# Altium PCB T-Type Converter.PcbDoc (part 1 of 4)
Units mil, origin at the board's own origin, x right, y up, seen from the top; angles counter-clockwise.
Board outline 14649.61 x 8960.63 mil, 2 copper layers (Top Layer, Bottom Layer), stack 64.8 mil thick; 214 components, 130 nets, 860 pads, 57 vias.
Unrouted connection lines stored in the file: 20.
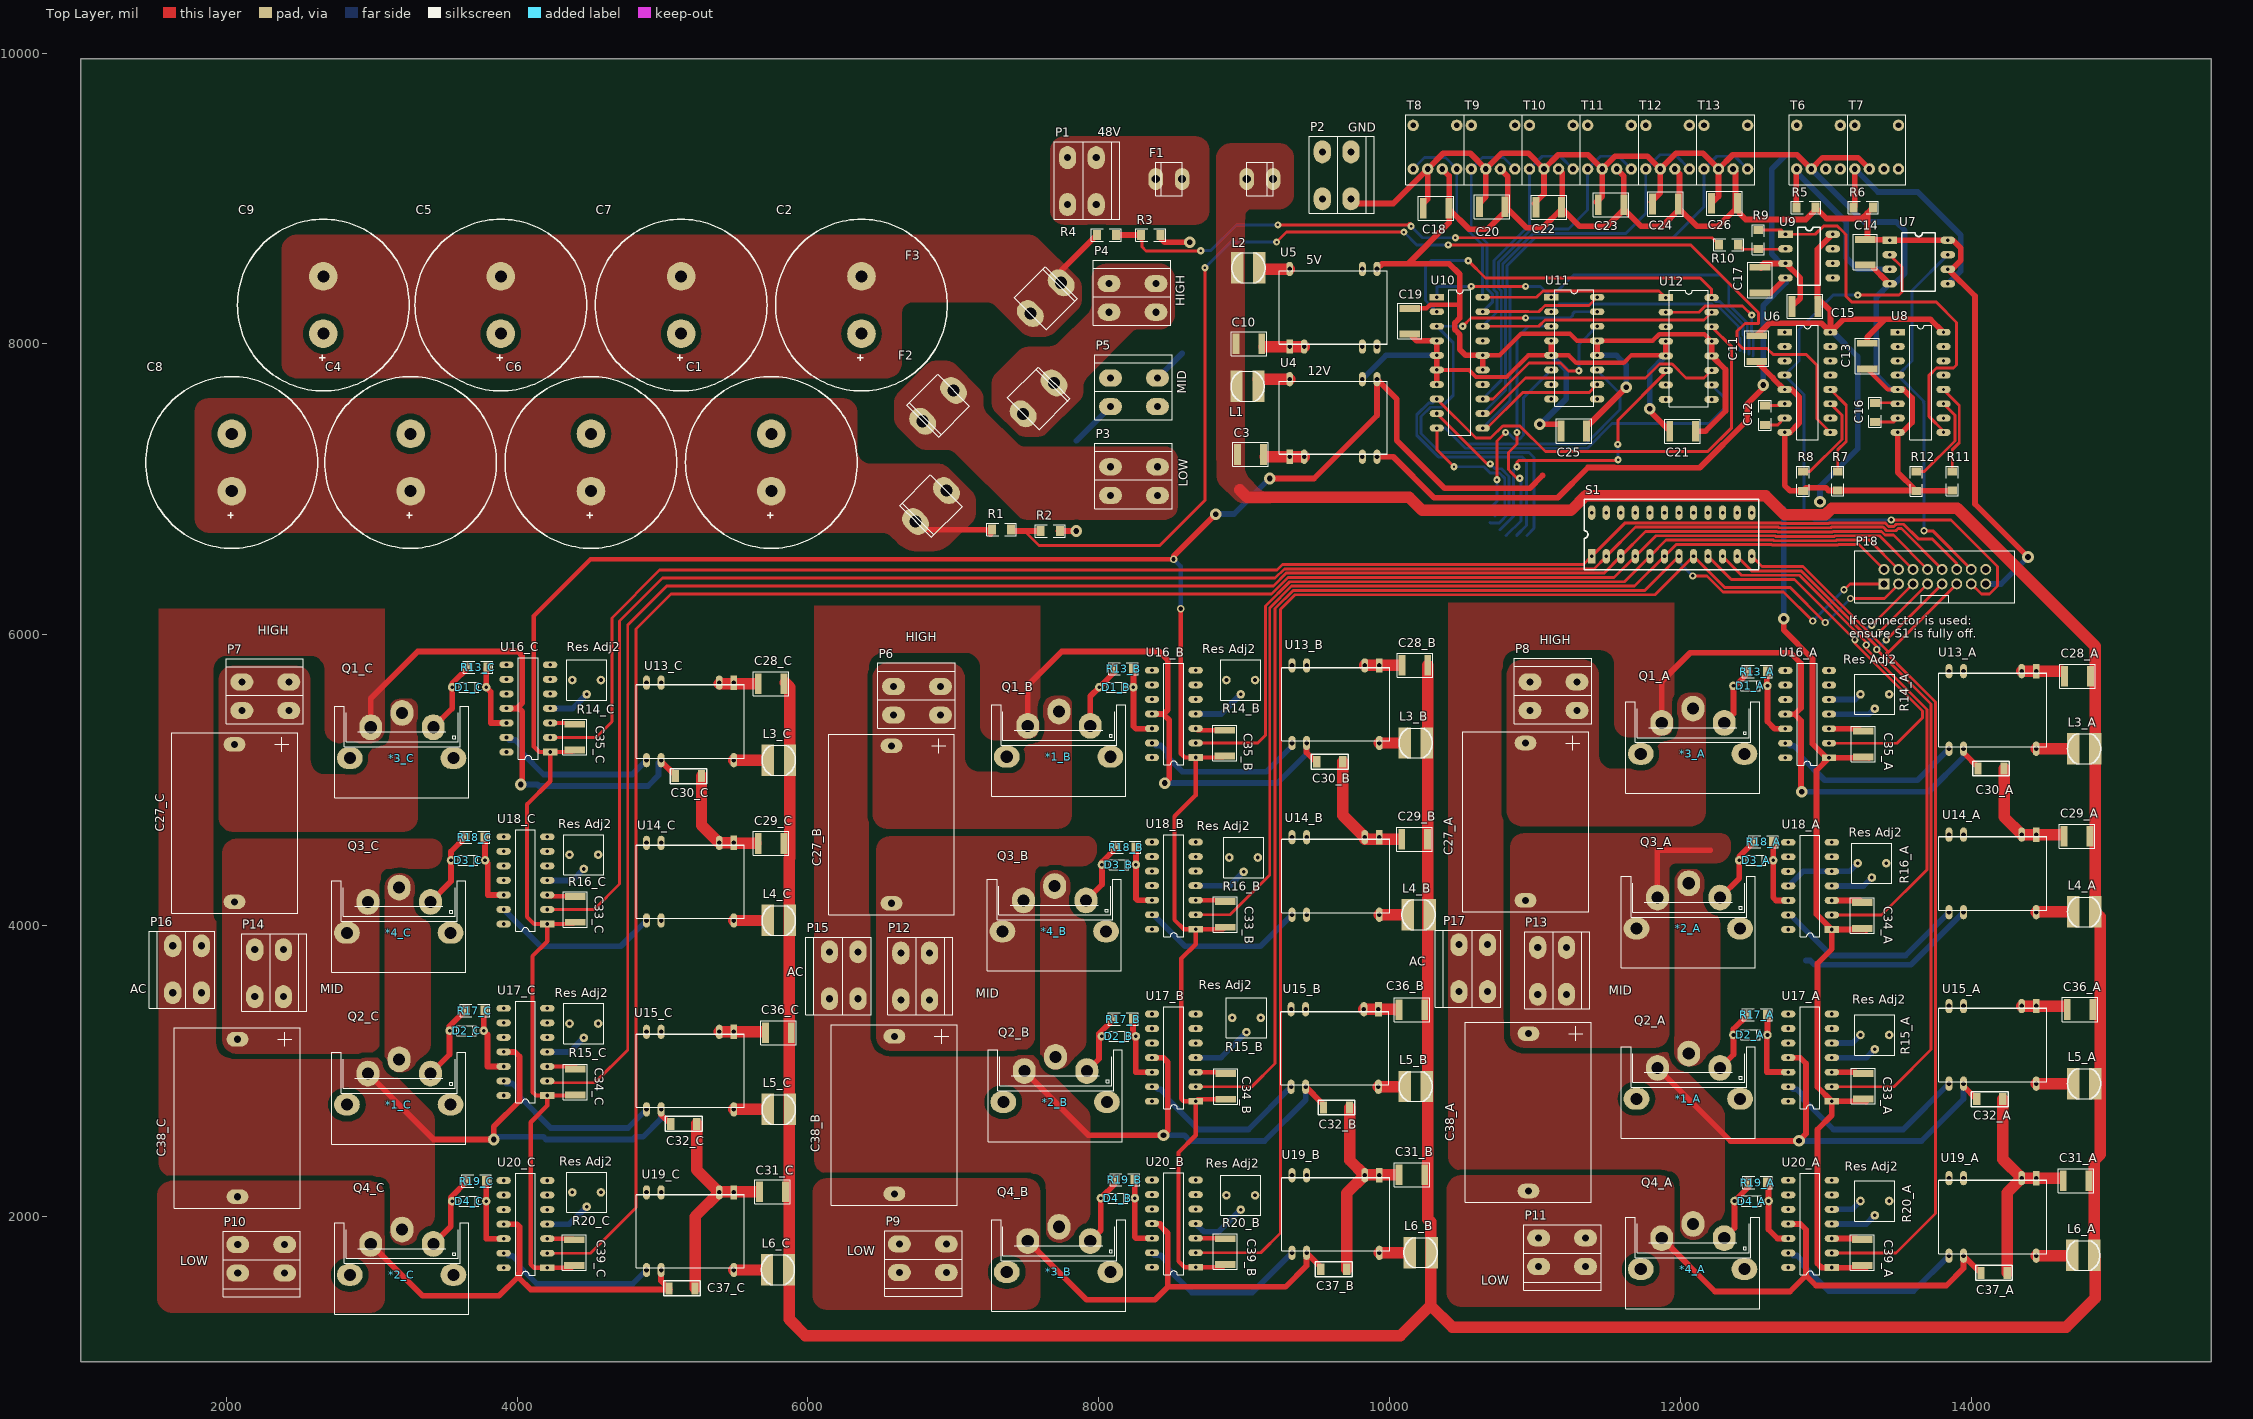
[diagram p0: Top Layer view]
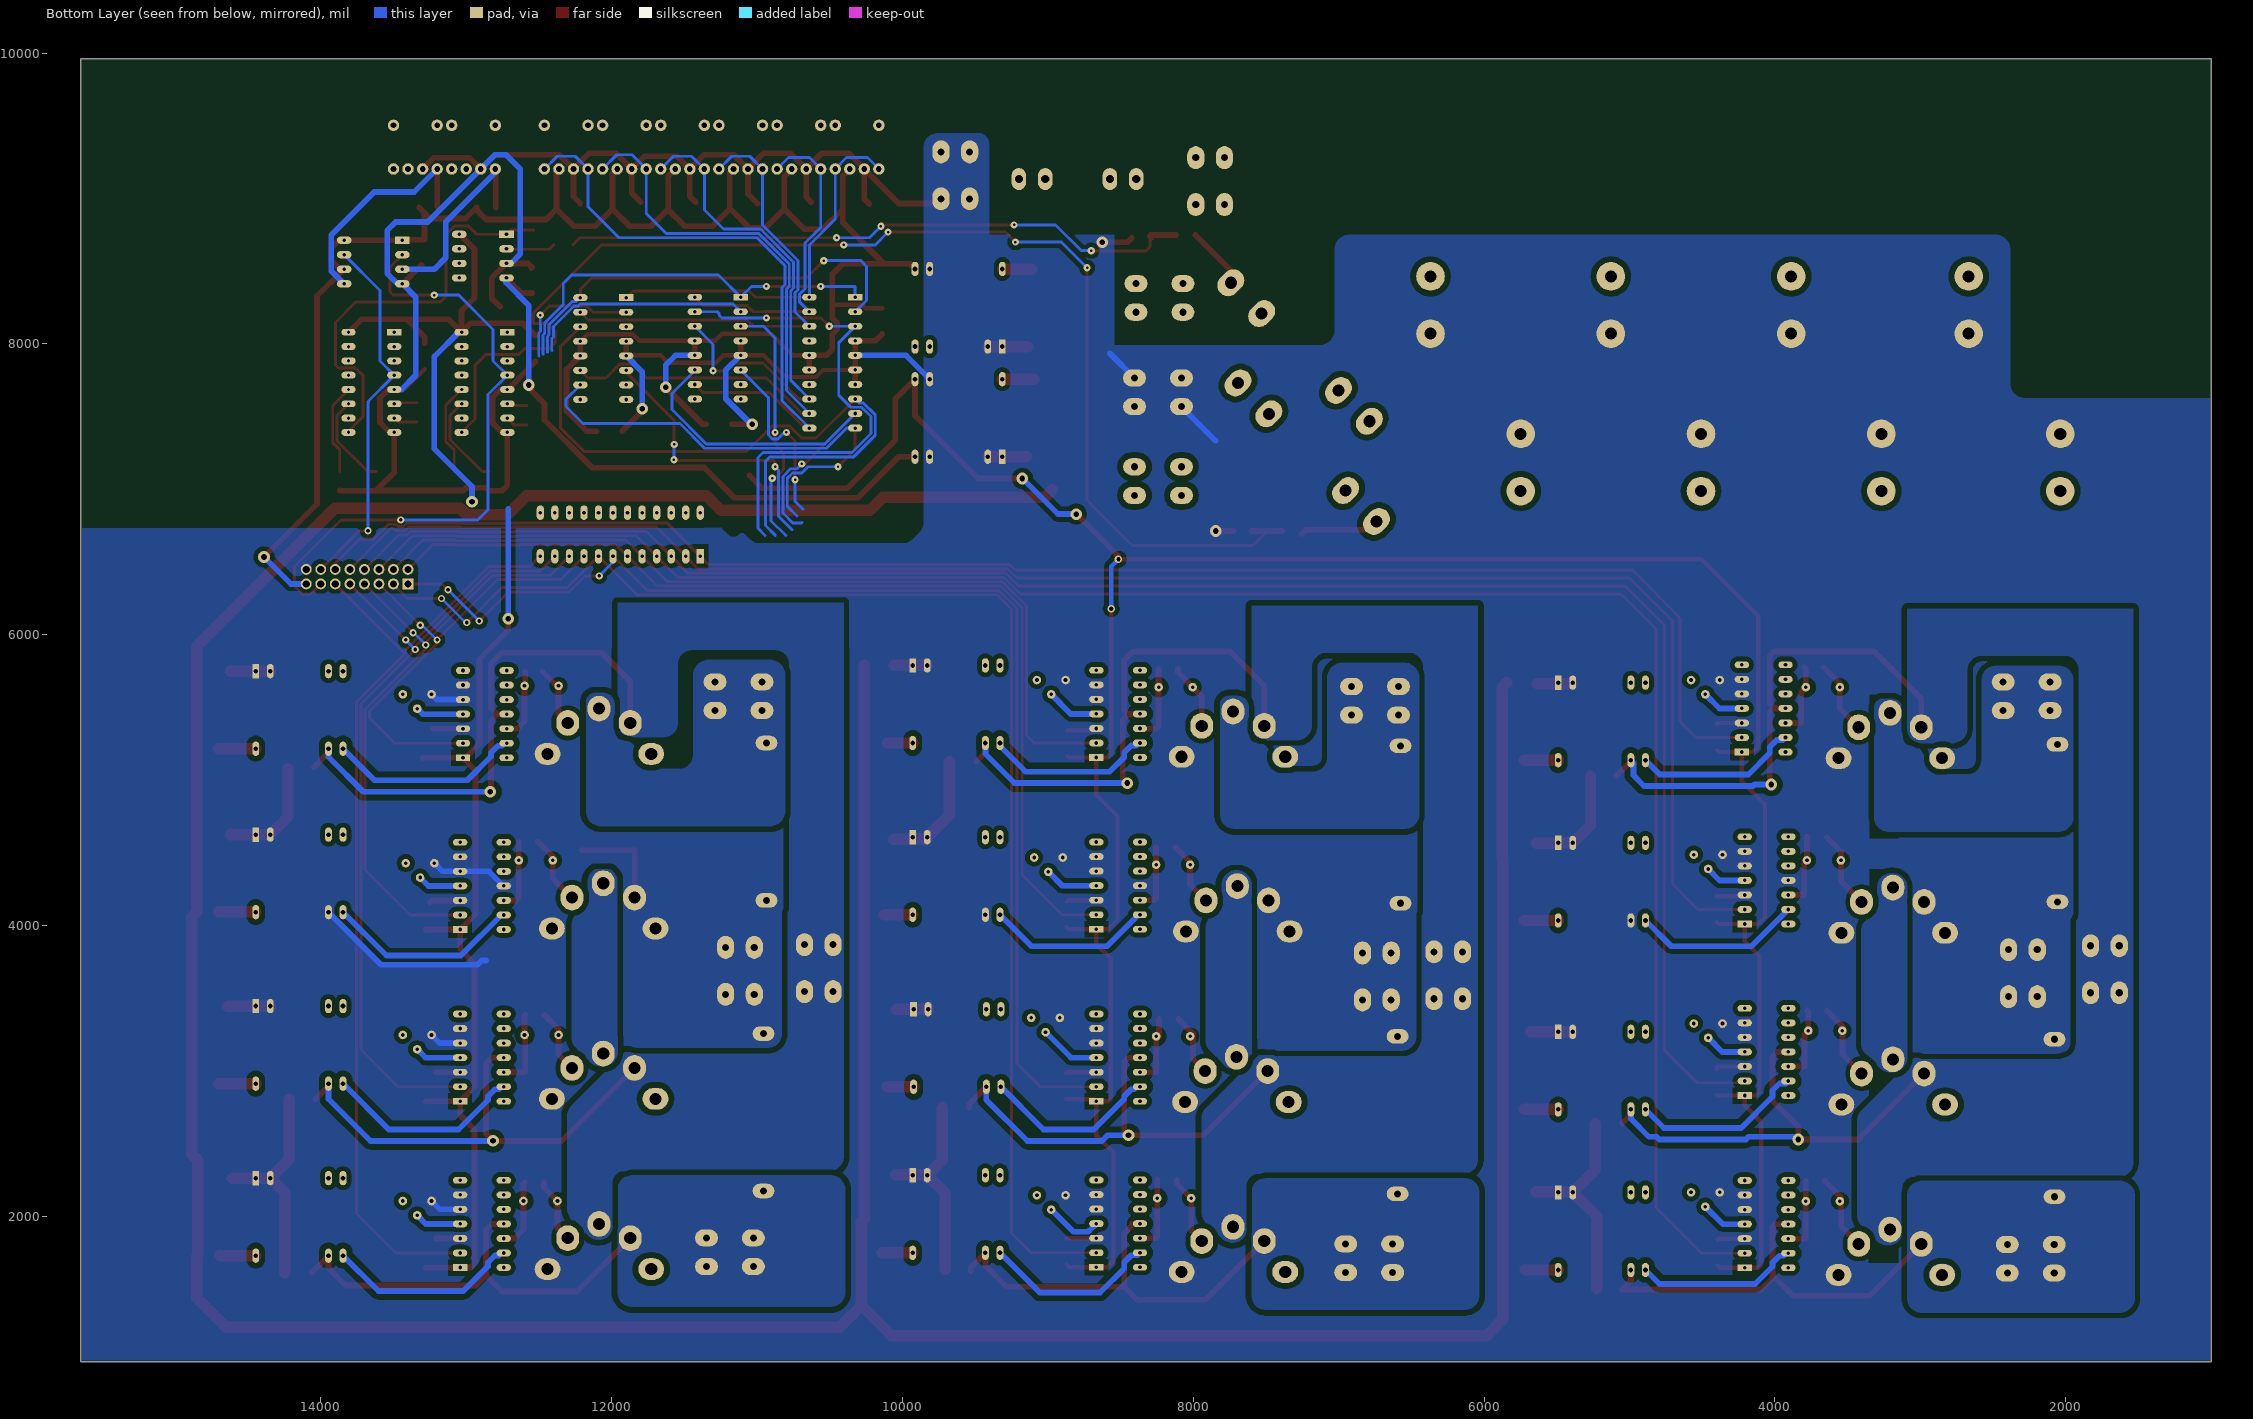
[diagram p1: Bottom Layer view, seen from below]

## Layer stack, top to bottom
Top Solder: solder mask 0.4, Solder Resist, Dk 3.5
Top Layer: signal copper 1.4
Dielectric 1: dielectric 62, FR-4, Dk 4.8
Bottom Layer: signal copper 1.4
Bottom Solder: solder mask 0.4, Solder Resist, Dk 3.5

## Board outline
1000,1000 15649.61,1000 15649.61,9960.63 1000,9960.63

## Design rules (kind name [scope] priority, off if disabled: settings)
BoardOutlineClearance [All] p1: gap=10 ignorepadtopadclearanceinfootprint=FALSE except(0: Arc-SplitContinuation Track-SplitContinuation SMDPad-SplitContinuation THPad-SplitContinuation Via-SplitContinuation Fill-SplitContinuation Poly-SplitContinuation Region-SplitContinuation Text-SplitContinuation)
Clearance Clearance_HV [InNetClass('HV')] p1: gap=39.37 ignorepadtopadclearanceinfootprint=FALSE except(0: Arc-Hole Track-Hole SMDPad-Hole THPad-Hole Via-Hole Fill-Hole Poly-Hole Region-Hole Text-Hole)
Clearance Clearance_1 [All] p2: gap=10 ignorepadtopadclearanceinfootprint=FALSE except(0: Arc-Hole Track-Hole SMDPad-Hole THPad-Hole Via-Hole Fill-Hole Poly-Hole Region-Hole Text-Hole; 31.5: Arc-Poly Track-Poly SMDPad-Poly THPad-Poly Via-Poly Fill-Poly Poly-Poly Poly-Region Poly-Text)
ComponentClearance [All] p1 off: gap=0.39 collisioncheckmode=3 verticalgap=100000 showdistances=FALSE
Height [All] p1: minheight=0 maxheight=1968.5 prefheight=500
HoleSize [All] p1: absolutevalues=TRUE maxlimit=314.96 minlimit=1 maxpercent=80.000 minpercent=20.000
PolygonConnect [All] p1: connectstyle=Direct reliefconductorwidth=10 reliefentries=4 polygonreliefangle="90 Angle" airgapwidth=10
RoutingVias [All] p1: holewidth=17 width=50 viastyle="Through Hole" minholewidth=10 minwidth=50 maxholewidth=40 maxwidth=80
SolderMaskExpansion [All] p1: expansion=4
Width [All] p1: maxlimit=78.74 minlimit=10 preferedwidth=30 minimp=50.000000 maximp=50.000000 favimp=50.000000
27 further rules are at their usual default settings.

## Classes and differential pairs
channel class Switches: A B C
component class A: *1_A *1_U_Switches3 *2_A *2_U_Switches3 *3_A *4_A *4_U_Switches3 *_U_Switches3 C27_A C28_A C29_A C30_A C31_A C32_A C33_A C34_A C35_A C36_A C37_A C38_A C39_A D1_A D2_A D3_A D4_A L3_A L4_A L5_A L6_A Q Q1_A Q2_A Q3_A Q4_A R13_A R14_A R15_A R16_A R17_A R18_A R19_A R20_A U13_A U14_A U15_A U16_A U17_A U18_A U19_A U20_A
component class B: *1_B *2_B *2_U_Switches2 *3_B *3_U_Switches2 *4_B *4_U_Switches2 *_U_Switches2 C27_B C28_B C29_B C30_B C31_B C32_B C33_B C34_B C35_B C36_B C37_B C38_B C39_B D1_B D2_B D3_B D4_B L3_B L4_B L5_B L6_B Q1_B Q2_B Q3_B Q4_B R13_B R14_B R15_B R16_B R17_B R18_B R19_B R20_B U13_B U14_B U15_B U16_B U17_B U18_B U19_B U20_B
component class C: *1_C *1_U_Switches1 *2_C *2_U_Switches1 *3_C *3_U_Switches1 *4_C *_U_Switches1 C27_C C28_C C29_C C30_C C31_C C32_C C33_C C34_C C35_C C36_C C37_C C38_C C39_C D1_C D2_C D3_C D4_C L3_C L4_C L5_C L6_C Q1_C Q2_C Q3_C Q4_C R13_C R14_C R15_C R16_C R17_C R18_C R19_C R20_C U13_C U14_C U15_C U16_C U17_C U18_C U19_C U20_C
component class U_Signals: C18 C19 C20 C21 C22 C23 C24 C25 C26 T8 T9 T10 T11 T12 T13 U10 U11 U12
component class Main: C1 C2 C3 C4 C5 C6 C7 C8 C9 C10 C11 C12 C13 C14 C15 C16 C17 F1 F2 F3 L1 L2 P1 P2 P3 P4 P5 P6 P7 P8 P9 P10 P11 P12 P13 P14 P15 P16 P17 P18 R1 R2 R3 R4 R5 R6 R7 R8 R9 R10 R11 R12 S1 T6 T7 U4 U5 U6 U7 U8 U9
net class HV: NetC1_1 NetC2_2 NetC27_A_1 NetC27_B_1 NetC27_C_1 NetC30_A_1 NetC30_B_1 NetC30_C_1 NetC37_A_1 NetC37_B_1 NetC37_C_1 NetD1_A_1 NetD1_B_1 NetD1_C_1 NetD2_A_1 NetD2_B_1 NetD2_C_1 NetD4_A_1 NetD4_B_1 NetD4_C_1 NetF2_1 NetF3_2 NetL3_A_2 NetL3_B_2 NetL3_C_2 NetL4_A_2 NetL4_B_2 NetL4_C_2 NetL5_A_2 NetL5_B_2 NetL5_C_2 NetL6_A_2 NetL6_B_2 NetL6_C_2 NetQ2_A_2 NetQ2_B_2 NetQ2_C_2 NetU13_A_8 NetU13_B_8 NetU13_C_8 NetU15_A_8 NetU15_B_8 NetU15_C_8 NetU19_A_8 NetU19_B_8 NetU19_C_8

## Components (designator, comment, footprint, x,y, rotation, side; value= is the part's Value field where it differs from the comment)
*1_A "WA-T264-101E" Heatsink 12514.76,2537.4 r90 top (schematic designator *1)
*1_B "WA-T264-101E" Heatsink 8184.06,4889.76 r90 top (schematic designator *1)
*1_C "WA-T264-101E" Heatsink 3646.65,2498.03 r90 top (schematic designator *1)
*2_A "WA-T264-101E" Heatsink 12514.76,3708.66 r90 top (schematic designator *2)
*2_B "WA-T264-101E" Heatsink 8160.53,2515.31 r90 top (schematic designator *2)
*2_C "WA-T264-101E" Heatsink 3666.34,1326.77 r90 top (schematic designator *2)
*3_A "WA-T264-101E" Heatsink 12544.29,4909.45 r90 top (schematic designator *3)
*3_B "WA-T264-101E" Heatsink 8184.06,1346.46 r90 top (schematic designator *3)
*3_C "WA-T264-101E" Heatsink 3666.34,4879.92 r90 top (schematic designator *3)
*4_A "WA-T264-101E" Heatsink 12544.29,1366.14 r90 top (schematic designator *4)
*4_B "WA-T264-101E" Heatsink 8154.53,3688.98 r90 top (schematic designator *4)
*4_C "WA-T264-101E" Heatsink 3646.65,3679.13 r90 top (schematic designator *4)
C1 "Cap Pol1" LGW2G331MELB40 5748.03,6988.19 r90 top value=330uF
C2 "Cap Pol1" LGW2G331MELB40 6368.11,8070.87 r90 top value=330uF
C3 "Cap" C4532 9043.31,7240.16 r180 top value=4.7uF
C4 "Cap Pol1" LGW2G331MELB40 3267.72,6988.19 r90 top value=330uF
C5 "Cap Pol1" LGW2G331MELB40 3887.8,8070.87 r90 top value=330uF
C6 "Cap Pol1" LGW2G331MELB40 4507.87,6988.19 r90 top value=330uF
C7 "Cap Pol1" LGW2G331MELB40 5127.95,8070.87 r90 top value=330uF
C8 "Cap Pol1" LGW2G331MELB40 2037.4,6988.19 r90 top value=330uF
C9 "Cap Pol1" LGW2G331MELB40 2667.32,8070.87 r90 top value=330uF
C10 "Cap" C4532 9032.48,8000.98 r180 top value=4.7uF
C11 "Cap" C4532 12523.62,7967.52 r90 top value=4.7uF
C12 "Cap" R_1206 12580.71,7508.86 r180 top value=2.2nF
C13 "Cap" C4532 13284.45,7916.34 r90 top value=4.7uF
C14 "Cap" C4532 13271.65,8630.91 r90 top value=4.7uF
C15 "Cap" C4532 12856.3,8257.87 r0 top value=4.7uF
C16 "Cap" R_1206 13336.61,7528.54 r180 top value=2.2nF
C17 "Cap" C4532 12547.24,8438.98 r90 top value=4.7uF
C18 "Cap" C4532 10319.88,8933.07 r0 top value=4.7uF
C19 "Cap" C4532 10138.78,8156.5 r90 top value=4.7uF
C20 "Cap" C4532 10705.71,8942.91 r0 top value=4.7uF
C21 "Cap" C4532 12014.76,7400.59 r0 top value=4.7uF
C22 "Cap" C4532 11094.49,8939.96 r0 top value=4.7uF
C23 "Cap" C4532 11523.62,8958.66 r0 top value=4.7uF
C24 "Cap" C4532 11896.65,8962.6 r0 top value=4.7uF
C25 "Cap" C4532 11266.73,7401.57 r0 top value=4.7uF
C26 "Cap" C4532 12303.15,8966.54 r0 top value=4.7uF
C27_A "Cap Pol1" B32674D3126K000 10935.04,5255.91 r270 top value=3.3mf (schematic designator C27)
C27_B "Cap Pol1" B32674D3126K000 6574.8,5236.22 r270 top value=3.3mf (schematic designator C27)
C27_C "Cap Pol1" B32674D3126K000 2057.09,5246.06 r270 top value=3.3mf (schematic designator C27)
C28_A "Cap" C4532 14730.32,5715.55 r0 top value=4.7uF (schematic designator C28)
C28_B "Cap" C4532 10174.21,5789.37 r0 top value=4.7uF (schematic designator C28)
C28_C "Cap" C4532 5747.05,5664.37 r0 top value=4.7uF (schematic designator C28)
C29_A "Cap" C4532 14727.36,4615.16 r0 top value=4.7uF (schematic designator C29)
C29_B "Cap" C4532 10172.24,4594.49 r0 top value=4.7uF (schematic designator C29)
C29_C "Cap" C4532 5747.05,4564.96 r0 top value=4.7uF (schematic designator C29)
C30_A "Cap" "LS 1808" 14135.83,5080.71 r0 top value=220pF (schematic designator C30)
C30_B "Cap" "LS 1808" 9588.58,5126.97 r0 top value=220pF (schematic designator C30)
C30_C "Cap" "LS 1808" 5178.15,5028.54 r0 top value=220pF (schematic designator C30)
C31_A "Cap" C4532 14721.46,2246.06 r0 top value=4.7uF (schematic designator C31)
C31_B "Cap" C4532 10153.54,2287.4 r0 top value=4.7uF (schematic designator C31)
C31_C "Cap" C4532 5755.91,2169.29 r0 top value=4.7uF (schematic designator C31)
C32_A "Cap" "LS 1808" 14126.97,2807.09 r0 top value=220pF (schematic designator C32)
C32_B "Cap" "LS 1808" 9634.84,2749.02 r0 top value=220pF (schematic designator C32)
C32_C "Cap" "LS 1808" 5145.67,2636.81 r0 top value=220pF (schematic designator C32)
C33_A "Cap" C4532 13257.87,2895.67 r270 top value=4.7uF (schematic designator C33)
C33_B "Cap" C4532 8871.06,4077.76 r270 top value=4.7uF (schematic designator C33)
C33_C "Cap" C4532 4398.62,4112.2 r270 top value=4.7uF (schematic designator C33)
C34_A "Cap" C4532 13250,4069.88 r270 top value=4.7uF (schematic designator C34)
C34_B "Cap" C4532 8872.05,2894.68 r270 top value=4.7uF (schematic designator C34)
C34_C "Cap" C4532 4398.62,2924.21 r270 top value=4.7uF (schematic designator C34)
C35_A "Cap" C4532 13257.87,5249.02 r270 top value=4.7uF (schematic designator C35)
C35_B "Cap" C4532 8865.16,5254.92 r270 top value=4.7uF (schematic designator C35)
C35_C "Cap" C4532 4395.67,5296.26 r270 top value=4.7uF (schematic designator C35)
C36_A "Cap" C4532 14749.02,3423.23 r0 top value=4.7uF (schematic designator C36)
C36_B "Cap" C4532 10153.54,3422.24 r0 top value=4.7uF (schematic designator C36)
C36_C "Cap" C4532 5796.26,3262.8 r0 top value=4.7uF (schematic designator C36)
C37_A "Cap" "LS 1808" 14157.48,1612.2 r0 top value=220pF (schematic designator C37)
C37_B "Cap" "LS 1808" 9616.14,1636.81 r0 top value=220pF (schematic designator C37)
C37_C "Cap" "LS 1808" 5133.86,1505.91 r0 top value=220pF (schematic designator C37)
C38_A "Cap Pol1" B32674D3126K000 10954.72,3257.87 r270 top value=3.3mf (schematic designator C38)
C38_B "Cap Pol1" B32674D3126K000 6594.49,3238.19 r270 top value=3.3mf (schematic designator C38)
C38_C "Cap Pol1" B32674D3126K000 2076.77,3218.5 r270 top value=3.3mf (schematic designator C38)
C39_A "Cap" C4532 13249.02,1751.97 r270 top value=4.7uF (schematic designator C39)
C39_B "Cap" C4532 8871.06,1757.87 r270 top value=4.7uF (schematic designator C39)
C39_C "Cap" C4532 4392.72,1750.98 r270 top value=4.7uF (schematic designator C39)
D1_A "1N4148" DO-35_02 12598.43,5683.07 r180 top (schematic designator D1)
D1_B "1N4148" DO-35_02 8238.19,5674.21 r180 top (schematic designator D1)
D1_C "1N4148" DO-35_02 3787.01,5674.21 r180 top (schematic designator D1)
D2_A "1N4148" DO-35_02 12598.43,3282.48 r180 top (schematic designator D2)
D2_B "1N4148" DO-35_02 8254.92,3273.62 r180 top (schematic designator D2)
D2_C "1N4148" DO-35_02 3769.68,3312.01 r180 top (schematic designator D2)
D3_A "1N4148" DO-35_02 12637.8,4483.27 r180 top (schematic designator D3)
D3_B "1N4148" DO-35_02 8255.51,4453.74 r180 top (schematic designator D3)
D3_C "1N4148" DO-35_02 3779.53,4483.27 r180 top (schematic designator D3)
D4_A "1N4148" DO-35_02 12605.91,2140.75 r180 top (schematic designator D4)
D4_B "1N4148" DO-35_02 8248.03,2160.43 r180 top (schematic designator D4)
D4_C "1N4148" DO-35_02 3787.01,2139.76 r180 top (schematic designator D4)
F1 "Fuse Holder" "Small Fuse Holder" 8391.83,9133.86 r0 top
F2 "Fuse Holder" "Fuse footprint" 7692.45,7731.82 r225 top
F3 "Fuse Holder" "Fuse footprint" 7741.66,8420.79 r225 top
L1 "Inductor" TCK-047 9141.73,7598.43 r90 top value=10mH
L2 "Inductor" TCK-047 9147.64,8413.39 r90 top value=10mH
L3_A "Inductor" TCK-047 14657.48,5326.77 r270 top value=10uH (schematic designator L3)
L3_B "Inductor" TCK-047 10061.02,5366.14 r270 top value=10uH (schematic designator L3)
L3_C "Inductor" TCK-047 5681.1,5248.03 r270 top value=10uH (schematic designator L3)
L4_A "Inductor" TCK-047 14657.48,4204.72 r270 top value=10uH (schematic designator L4)
L4_B "Inductor" TCK-047 10080.71,4185.04 r270 top value=10uH (schematic designator L4)
L4_C "Inductor" TCK-047 5681.1,4145.67 r270 top value=10uH (schematic designator L4)
L5_A "Inductor" TCK-047 14657.48,3023.62 r270 top value=10uH (schematic designator L5)
L5_B "Inductor" TCK-047 10061.02,3003.94 r270 top value=10uH (schematic designator L5)
L5_C "Inductor" TCK-047 5681.1,2846.46 r270 top value=10uH (schematic designator L5)
L6_A "Inductor" TCK-047 14651.57,1842.52 r270 top value=10uH (schematic designator L6)
L6_B "Inductor" TCK-047 10094.49,1862.21 r270 top value=10uH (schematic designator L6)
L6_C "Inductor" TCK-047 5675.2,1744.09 r270 top value=10uH (schematic designator L6)
P1 "1991095" "Terminal Pad" 7785.43,8958.66 r0 top
P2 "1991095" "Terminal Pad" 9537.4,8998.03 r0 top
P3 "1991095" "Terminal Pad" 8403.54,6958.66 r90 top
P4 "1991095" "Terminal Pad" 8393.7,8218.5 r90 top
P5 "1991095" "Terminal Pad" 8403.54,7568.9 r90 top
P6 "B2A-PCB-HEX" "Terminal Pad" 6911.42,5447.83 r90 top
P7 "B2A-PCB-HEX" "Terminal Pad" 2430.12,5478.35 r90 top
P8 "B2A-PCB-HEX" "Terminal Pad" 11288.39,5479.33 r90 top
P9 "B2A-PCB-HEX" "Terminal Pad" 6628.94,1811.02 r270 top
P10 "B2A-PCB-HEX" "Terminal Pad" 2078.74,1807.09 r270 top
P11 "B2A-PCB-HEX" "Terminal Pad" 11024.61,1852.36 r270 top
P12 "B2A-PCB-HEX" "Terminal Pad" 6638.78,3489.17 r0 top
P13 "B2A-PCB-HEX" "Terminal Pad" 11018.7,3527.56 r0 top
P14 "B2A-PCB-HEX" "Terminal Pad" 2195.87,3511.81 r0 top
P15 "1991095" "Terminal Pad" 6344.49,3819.88 r180 top
P16 "1991095" "Terminal Pad" 1828.74,3861.22 r180 top
P17 "1991095" "Terminal Pad" 10673.23,3869.09 r180 top
P18 "Header 8X2A" 302-S161 13400,6350 r0 top
Q1_A "IXFK 34N80" "TO-264 AA" 11871.65,5393.7 r0 top (schematic designator Q1)
Q1_B "IXFK 34N80" "TO-264 AA" 7511.42,5374.02 r0 top (schematic designator Q1)
Q1_C "IXFK 34N80" "TO-264 AA" 2993.7,5364.17 r0 top (schematic designator Q1)
Q2_A "IXFK 34N80" "TO-264 AA" 11842.13,3021.65 r0 top (schematic designator Q2)
Q2_B "IXFK 34N80" "TO-264 AA" 7487.89,2999.56 r0 top (schematic designator Q2)
Q2_C "IXFK 34N80" "TO-264 AA" 2974.02,2982.28 r0 top (schematic designator Q2)
Q3_A "IXFK 34N80" "TO-264 AA" 11842.13,4192.91 r0 top (schematic designator Q3)
Q3_B "IXFK 34N80" "TO-264 AA" 7481.89,4173.23 r0 top (schematic designator Q3)
Q3_C "IXFK 34N80" "TO-264 AA" 2974.02,4163.39 r0 top (schematic designator Q3)
Q4_A "IXFK 34N80" "TO-264 AA" 11871.65,1850.39 r0 top (schematic designator Q4)
Q4_B "IXFK 34N80" "TO-264 AA" 7511.42,1830.71 r0 top (schematic designator Q4)
Q4_C "IXFK 34N80" "TO-264 AA" 2993.7,1811.02 r0 top (schematic designator Q4)
R1 "300k" R_1206 7332.68,6722.44 r270 top
R2 "12.5k" R_1206 7667.32,6712.6 r270 top
R3 "12.5k" R_1206 8356.3,8750 r90 top
R4 "300k" R_1206 8051.18,8750 r90 top
R5 "55.5" R_1206 12864.17,8937.01 r270 top
R6 "55.5" R_1206 13257.87,8937.01 r270 top
R7 "5k" R_1206 13080.71,7057.09 r180 top
R8 "10k" R_1206 12844.49,7057.09 r0 top
R9 "1k" R_1206 12536.42,8718.5 r0 top
R10 "1k" R_1206 12332.68,8681.1 r270 top
R11 "5k" R_1206 13868.11,7057.09 r180 top
R12 "10k" R_1206 13622.05,7057.09 r0 top
R13_A "1" R_1206 12527.56,5748.03 r90 top (schematic designator R13)
R13_B "1" R_1206 8169.29,5767.72 r90 top (schematic designator R13)
R13_C "1" R_1206 3730.32,5777.56 r90 top (schematic designator R13)
R14_A "Res Adj2" CT-6EP 13435.04,5590.55 r180 top (schematic designator R14)
R14_B "Res Adj2" CT-6EP 9074.8,5688.98 r180 top (schematic designator R14)
R14_C "Res Adj2" CT-6EP 4576.77,5688.98 r180 top (schematic designator R14)
R15_A "Res Adj2" CT-6EP 13435.04,3248.03 r180 top (schematic designator R15)
R15_B "Res Adj2" CT-6EP 9114.17,3366.14 r180 top (schematic designator R15)
R15_C "Res Adj2" CT-6EP 4557.09,3326.77 r180 top (schematic designator R15)
R16_A "Res Adj2" CT-6EP 13415.35,4429.13 r180 top (schematic designator R16)
R16_B "Res Adj2" CT-6EP 9094.49,4468.5 r180 top (schematic designator R16)
R16_C "Res Adj2" CT-6EP 4557.09,4488.19 r180 top (schematic designator R16)
R17_A "1" R_1206 12529.53,3385.83 r270 top (schematic designator R17)
R17_B "1" R_1206 8169.29,3356.3 r270 top (schematic designator R17)
R17_C "1" R_1206 3710.63,3415.35 r270 top (schematic designator R17)
R18_A "1" R_1206 12572.83,4575.79 r270 top (schematic designator R18)
R18_B "1" R_1206 8188.98,4537.4 r270 top (schematic designator R18)
R18_C "1" R_1206 3710.63,4606.3 r270 top (schematic designator R18)
R19_A "1" R_1206 12529.53,2234.25 r90 top (schematic designator R19)
R19_B "1" R_1206 8179.13,2253.94 r90 top (schematic designator R19)
R19_C "1" R_1206 3720.47,2244.09 r90 top (schematic designator R19)
R20_A "Res Adj2" CT-6EP 13435.04,2106.3 r180 top (schematic designator R20)
R20_B "Res Adj2" CT-6EP 9074.8,2145.67 r180 top (schematic designator R20)
R20_C "Res Adj2" CT-6EP 4576.77,2165.35 r180 top (schematic designator R20)
S1 "DIP 12 SPST" "DIP12 SPST" 11390,6540 r90 top
T6 "TX" Optics 13149.61,9094.49 r90 top
T7 "TX" Optics 13549.61,9094.49 r90 top
T8 "RX" Optics 10511.81,9094.49 r90 top
T9 "RX" Optics 10911.81,9094.49 r90 top
T10 "RX" Optics 11311.81,9094.49 r90 top
T11 "RX" Optics 11711.81,9094.49 r90 top
T12 "RX" Optics 12111.81,9094.49 r90 top
T13 "RX" Optics 12511.81,9094.49 r90 top
U4 "TDR 3-4822" "PID DC-DC Converter - duplicate" 9912.99,7757.87 r270 top
U5 "TDR 3-4811" "PID DC-DC Converter - duplicate" 9912.99,8515.75 r270 top
U6 "CD4046B" DIP16 12716.54,8080.71 r0 top
U7 "SN75451B" R-PDIP-T8 13438.58,8713.78 r0 top
U8 "CD4046B" DIP16 13494.09,8080.71 r0 top
U9 "LT1057CN8" "N8 PDIP" 12722.44,8754.13 r0 top
U10 "74AC11004" R-PDIP-T20 10324.8,8321.65 r0 top
U11 "74AC11008" R-PDIP-T16 11112.2,8321.65 r0 top
U12 "74AC11008" R-PDIP-T16 11899.61,8318.5 r0 top
U13_A "TDR 3-4812" "PID DC-DC Converter - duplicate" 13846.85,5216.54 r90 top (schematic designator U13)
U13_B "TDR 3-4812" "PID DC-DC Converter - duplicate" 9329.13,5255.91 r90 top (schematic designator U13)
U13_C "TDR 3-4812" "PID DC-DC Converter - duplicate" 4890.16,5137.8 r90 top (schematic designator U13)
U14_A "TDR 3-4812" "PID DC-DC Converter - duplicate" 13846.85,4092.52 r90 top (schematic designator U14)
U14_B "TDR 3-4812" "PID DC-DC Converter - duplicate" 9329.13,4074.8 r90 top (schematic designator U14)
U14_C "TDR 3-4812" "PID DC-DC Converter - duplicate" 4890.16,4035.43 r90 top (schematic designator U14)
U15_A "TDR 3-4812" "PID DC-DC Converter - duplicate" 13846.85,2913.39 r90 top (schematic designator U15)
U15_B "TDR 3-4812" "PID DC-DC Converter - duplicate" 9322.83,2891.73 r90 top (schematic designator U15)
U15_C "TDR 3-4812" "PID DC-DC Converter - duplicate" 4890.16,2736.22 r90 top (schematic designator U15)
U16_A "IR21094" DIP14 13021.65,5154.33 r180 top (schematic designator U16)
U16_B "IR21094" DIP14 8666.14,5155.91 r180 top (schematic designator U16)
U16_C "IR21094" DIP14 4227.17,5193.7 r180 top (schematic designator U16)
U17_A "IR21094" DIP14 13041.34,2792.13 r180 top (schematic designator U17)
U17_B "IR21094" DIP14 8666.14,2792.13 r180 top (schematic designator U17)
U17_C "IR21094" DIP14 4207.48,2831.5 r180 top (schematic designator U17)
U18_A "IR21094" DIP14 13041.34,3973.23 r180 top (schematic designator U18)
U18_B "IR21094" DIP14 8666.14,3974.8 r180 top (schematic designator U18)
U18_C "IR21094" DIP14 4207.48,4011.02 r180 top (schematic designator U18)
U19_A "TDR 3-4812" "PID DC-DC Converter - duplicate" 13846.85,1730.32 r90 top (schematic designator U19)
U19_B "TDR 3-4812" "PID DC-DC Converter - duplicate" 9329.13,1750 r90 top (schematic designator U19)
U19_C "TDR 3-4812" "PID DC-DC Converter - duplicate" 4890.16,1631.89 r90 top (schematic designator U19)
U20_A "IR21094" DIP14 13041.34,1648.82 r180 top (schematic designator U20)
U20_B "IR21094" DIP14 8666.14,1650.39 r180 top (schematic designator U20)
U20_C "IR21094" DIP14 4207.48,1647.24 r180 top (schematic designator U20)

## Footprints (in the part's own frame and the unit in brackets; to place one, negate y for a bottom-side part, rotate by r counter-clockwise, add the part's x,y. Pads: shape width x height; smd on the part's side, far side on the other; paste and mask are expansions set on the pad)
302-S161 [mil] "16 pin connector"
  rect 75x75 hole 49: 1(0,0)
  round 75 hole 49: 2(100,0) 3(200,0) 4(300,0) 5(400,0) 6(500,0) 7(600,0) 8(700,0) 9(0,100) 10(100,100) 11(200,100) 12(300,100) 13(400,100) 14(500,100) 15(600,100) 16(700,100)
  silkscreen extent -200,-129 900,229
B32674D3126K000 [mil] "Film cap"
  oval 100x150 hole 49: 1(0,0) 2(1082.68,0)
  silkscreen extent -79,-433 1161,433
C4532 [mm]
  rect 1.2x3.6 smd: 1(-2.25,0) 2(2.25,0)
  silkscreen extent -3.1,-2.1 3.1,2.1
CT-6EP [mm] "pot"
  round 1.5 hole 0.635: 1(5,0) 2(2.5,2.5) 3(0,0)
  silkscreen extent -1,-3.5 6,3.5
"DIP12 SPST" [mil]
  rect 100x50 hole 25: 1(0,0)
  oval 100x50 hole 25: 2(0,-100) 3(0,-200) 4(0,-300) 5(0,-400) 6(0,-500) 7(0,-600) 8(0,-700) 9(0,-800) 10(0,-900) 11(0,-1000) 12(0,-1100) 13(300,-1100) 14(300,-1000) 15(300,-900) 16(300,-800) 17(300,-700) 18(300,-600) 19(300,-500) 20(300,-400) 21(300,-300) 22(300,-200) 23(300,-100) 24(300,0)
  silkscreen extent -93,-1150 393,50
DIP14 [mm]
  rect 2.5x1.2 hole 0.635: 1(0,0)
  oval 2.5x1.2 hole 0.635: 2(0,-2.54) 3(0,-5.08) 4(0,-7.62) 5(0,-10.16) 6(0,-12.7) 7(0,-15.24) 8(7.62,-15.24) 9(7.62,-12.7) 10(7.62,-10.16) 11(7.62,-7.62) 12(7.62,-5.08) 13(7.62,-2.54) 14(7.62,0)
  silkscreen extent 2.08,-16.51 5.54,1.27
DIP16 [mm]
  rect 2.5x1.2 hole 0.6: 1(0,0)
  oval 2.5x1.2 hole 0.6: 2(0,-2.5) 3(0,-5) 4(0,-7.5) 5(0,-10) 6(0,-12.5) 7(0,-15) 8(0,-17.5) 9(8,-17.5) 10(8,-15) 11(8,-12.5) 12(8,-10) 13(8,-7.5) 14(8,-5) 15(8,-2.5) 16(8,0)
  silkscreen extent 2.08,-18.75 5.91,1.25
DO-35_02 [mm]
  round 1.5 hole 0.635: 1(0,0.875) 2(5.94,0.875)
  silkscreen extent 1.27,0 4.67,1.75
"Fuse footprint" [mil]
  oval 150x200 hole 83: 1(0,0) 1(300,0) 2(1047,0) 2(1347,0)
  silkscreen extent 0,-155 1347,155
Heatsink [mm] "WA-T264-101E"
  oval 3.81x4.5 hole 2.108: 1(6.9,20.75) 1(6.9,2.65)
  silkscreen extent 0,0 16,23.4
LGW2G331MELB40 [mm] "Capacitor"
  round 5 hole 2.108: 1(0,0) 2(10,0)
  silkscreen extent -10,-15 20,15
"LS 1808" [mil]
  rect 50x82 smd: 1(-90,0) 2(90,0)
  silkscreen extent -126,-51 126,51
"N8 PDIP" [mil]
  rect 100x50 hole 25: 1(0,0)
  oval 100x50 hole 25: 2(0,-100) 3(0,-200) 4(0,-300) 5(325,-300) 6(325,-200) 7(325,-100) 8(325,0)
  silkscreen extent 85,-350 240,50
Optics [mm]
  round 2 hole 0.991: 1(2.77,8.89) 2(2.77,6.35) 3(2.77,3.81) 4(2.77,1.27) 5(10.39,1.27) 8(10.39,8.89)
  silkscreen extent 0,0 12.24,10.16
"PID DC-DC Converter - duplicate" [mm]
  rect 2.5x1.2 hole 0.813: 1(13.55,-15.24)
  oval 2.5x1.2 hole 0.813: 2(13.55,-12.7) 6(13.55,-2.54) 7(13.55,0) 8(0,0) 9(0,-2.54) 14(0,-15.24)
  silkscreen extent 0.35,-17.04 13.15,1.8
R-PDIP-T8 [mil]
  rect 100x50 hole 25: 1(0,0)
  oval 100x50 hole 25: 2(0,-100) 3(0,-200) 4(0,-300) 5(400,-300) 6(400,-200) 7(400,-100) 8(400,0)
  silkscreen extent 85,-350 315,50
R-PDIP-T16 [mm]
  rect 2.5x1.2 hole 0.635: 1(0,0)
  oval 2.5x1.2 hole 0.635: 2(0,-2.54) 3(0,-5.08) 4(0,-7.62) 5(0,-10.16) 6(0,-12.7) 7(0,-15.24) 8(0,-17.78) 9(8,-17.78) 10(8,-15.24) 11(8,-12.7) 12(8,-10.16) 13(8,-7.62) 14(8,-5.08) 15(8,-2.54) 16(8,0)
  silkscreen extent 0.61,-19.05 7.39,1.27
R-PDIP-T20 [mm]
  rect 2.5x1.2 hole 0.635: 1(0,0)
  oval 2.5x1.2 hole 0.635: 2(0,-2.54) 3(0,-5.08) 4(0,-7.62) 5(0,-10.16) 6(0,-12.7) 7(0,-15.24) 8(0,-17.78) 9(0,-20.32) 10(0,-22.86) 11(8,-22.86) 12(8,-20.32) 13(8,-17.78) 14(8,-15.24) 15(8,-12.7) 16(8,-10.16) 17(8,-7.62) 18(8,-5.08) 19(8,-2.54) 20(8,0)
  silkscreen extent 2.08,-24.13 5.91,1.27
R_1206 [mm]
  rect 1.7x1.4 smd: 1(-0.025,-1.7) 2(-0.025,1.65)
  silkscreen extent -1.1,-2.63 1.05,2.58, body extent -0.81,-1.68 0.8,1.68, height 1.1
"Small Fuse Holder" [mil]
  oval 100x150 hole 57: 1(0,0) 1(181,0) 2(626,0) 2(807,0)
  silkscreen extent 0,-115 807,115
TCK-047 [mm]
  rect 5.5x2.15 smd: 1(2.8,4.95) 2(2.8,1.1)
  silkscreen extent 0.2,0.1 5.4,5.9
"Terminal Pad" [mm]
  oval 3x4 hole 1.245: 1(0,0) 1(0,8.2) 2(5,0) 2(5,8.2)
  silkscreen extent -2.3,-2.55 9.1,10.95
"TO-264 AA" [mm] "Power Mosfet"
  oval 4x4.5 hole 2.108: 1(10.92,0) 2(5.46,2.5) 3(0,0)
  silkscreen extent -4.32,-2.54 15.24,2.5

## Part data
*1_A *1_B *1_C *2_A *2_B *2_C *3_A *3_B *3_C *4_A *4_B *4_C: "Heat Sink"
C1 C2 C4 C5 C6 C7 C8 C9: "Polarized Capacitor (Radial)", Capacitance=330uF, Case/Package=Radial, Leakage Current=1.08mA, Manufacturer=Nichicon, Manufacturer Part Number=LGW2G331MELB40, Max Operating Temperature=105°C, Min Operating Temperature=-25°C, Package Quantity=200, Ripple Current=2.33A, Supplier Part Number 1=493-3229-ND, Tolerance=20%, Voltage=400V, ComponentLink1Description=https://datasheet.ciiva.com/101/e-gw-101040.pdf, ComponentLink1URL=https://datasheet.ciiva.com/101/e-gw-101040.pdf, ComponentLink2Description=https://datasheet.ciiva.com/5376/e-gw-28778-5376397.pdf, ComponentLink2URL=https://datasheet.ciiva.com/5376/e-gw-28778-5376397.pdf, Diameter=30mm, Height=40mm, Height - Seated (Max)=1.575inch, LatestRevisionDate=17-Jul-2002, LatestRevisionNote="Re-released for DXP Platform.", Lead Diameter=0.8mm, Lead Pitch=10mm, Length=40mm, Life (Hours)=3000Hour, Mount="Through Hole", PackageDescription="Polarized Capacitor (Radial); 2 Leads", PackageReference=RB7.6-15, Packaging=Bulk, Polarity=Polar, Pricing 1="1=6.67, 10=5.926, 100=4.7406, 500=4.074, 1000=3.8377 (USD)", Published=8-Jun-2000, Publisher="Altium Limited", Stock 1=0, Supplier 1=Digi-Key, Termination="Snap in", Voltage Rating=400V
C3 C10 C11 C13 C14 C15 C17 C19 C21 C25 C28_A C28_B C28_C C29_A C29_B C29_C C31_A C31_B C31_C C33_A C33_B C33_C C34_A C34_B C34_C C35_A C35_B C35_C C36_A C36_B C36_C C39_A C39_B C39_C: "Capacitor", Capacitance=4.7uF, Case/Package=1812, Case Code (Metric)=4532, Dielectric=X7S, Manufacturer=TDK, Manufacturer Part Number=CGA8N3X7S2A475K230KB, Max Operating Temperature=125°C, Min Operating Temperature=-55°C, Package Quantity=1, Supplier Part Number 1=445-7923-1-ND, Tolerance=10%, Voltage Rating=100V, Case Code (Imperial)=1812, ComponentLink1Description=https://datasheet.ciiva.com/24217/cga8n3x7s2a475k230kb-266118-24217101.pdf, ComponentLink1URL=https://datasheet.ciiva.com/24217/cga8n3x7s2a475k230kb-266118-24217101.pdf, Composition=Ceramic, Depth=3.2mm, Height=1.6mm, LatestRevisionDate=17-Jul-2002, LatestRevisionNote="Re-released for DXP Platform.", Length=4.5mm, PackageDescription="Radial Cap, Thru-Hole; 2 Leads; 0.3 in Pin Spacing", PackageReference=RAD-0.3, Packaging="Tape and Reel", Pricing 1="1=1.92, 10=1.518, 100=1.1385 (USD)", Published=8-Jun-2000, Publisher="Altium Limited", REACH SVHC="No SVHC", Supplier 1=Digi-Key, Termination=SMD/SMT, Thickness=0.091inch, Voltage Rating (DC)=100V, Weight=0.000952oz, Width=0.126inch
  C3 C10 C28_A C28_B C28_C C29_A C29_B C29_C C31_A C31_B C31_C C36_A C36_B C36_C: Stock 1=236
  C11 C13 C14 C15 C17 C19 C21 C25 C33_A C33_B C33_C C34_A C34_B C34_C C35_A C35_B C35_C C39_A C39_B C39_C: Stock 1=0
C12 C16: "Capacitor", Capacitance=220pF, Case/Package=1206, Case Code (Metric)=3216, Dielectric=C0G, Manufacturer=TDK, Manufacturer Part Number=CGA5C4C0G2J221J060AA, Max Operating Temperature=125°C, Min Operating Temperature=-55°C, Package Quantity=1, Supplier Part Number 1=445-5781-6-ND, Tolerance=5%, Voltage Rating=630V, Case Code (Imperial)=1206, ComponentLink1Description=http://www.farnell.com/datasheets/2130384.pdf, ComponentLink1URL=http://www.farnell.com/datasheets/2130384.pdf, ComponentLink2Description=http://components.arrow.com/part/dataview/57435972S460237N1165, ComponentLink2URL=http://components.arrow.com/part/dataview/57435972S460237N1165, ComponentLink3Description=http://components.arrow.com/part/dataview/0323_06888476, ComponentLink3URL=http://components.arrow.com/part/dataview/0323_06888476, ComponentLink4Description=http://www.mouser.com/ds/2/400/lcc_automotive_midvoltage_en-355485.pdf, ComponentLink4URL=http://www.mouser.com/ds/2/400/lcc_automotive_midvoltage_en-355485.pdf, ComponentLink5Description=http://product.tdk.com/en/catalog/spec/mlccspec_automotive_general_midvoltage_en.pdf, ComponentLink5URL=http://product.tdk.com/en/catalog/spec/mlccspec_automotive_general_midvoltage_en.pdf, ComponentLink6Description=http://www.farnell.com/datasheets/1807242.pdf, ComponentLink6URL=http://www.farnell.com/datasheets/1807242.pdf, ComponentLink7Description=http://www.tdk.co.jp/tefe02/e413_cga.pdf, ComponentLink7URL=http://www.tdk.co.jp/tefe02/e413_cga.pdf, Composition=Ceramic, Depth=1.6mm, Height=0.6mm, Length=3.2mm, Packaging="Tape and Reel", Pricing 1="1=0.33, 10=0.228, 100=0.129, 500=0.0911, 1000=0.0797 (USD)", REACH SVHC="No SVHC", Stock 1=13089, Supplier 1=Digi-Key, Termination=SMD/SMT, Thickness=0.03inch, Voltage Rating (DC)=630V, Weight=0.000571oz, Width=0.063inch
C18 C20 C22 C23 C24 C26 C30_A C30_B C30_C C32_A C32_B C32_C C37_A C37_B C37_C: "Capacitor", LatestRevisionDate=17-Jul-2002, LatestRevisionNote="Re-released for DXP Platform.", PackageDescription="Radial Cap, Thru-Hole; 2 Leads; 0.3 in Pin Spacing", PackageReference=RAD-0.3, Published=8-Jun-2000, Publisher="Altium Limited"
C27_A C27_B C27_C C38_A C38_B C38_C: "Polarized Capacitor (Radial)", LatestRevisionDate=17-Jul-2002, LatestRevisionNote="Re-released for DXP Platform.", PackageDescription="Polarized Capacitor (Radial); 2 Leads", PackageReference=RB7.6-15, Published=8-Jun-2000, Publisher="Altium Limited"
D1_A D1_B D1_C D2_A D2_B D2_C D3_A D3_B D3_C D4_A D4_B D4_C: "Diode", Average Rectified Current=200mA, Capacitance=4pF, Forward Voltage=1V, Manufacturer="Fairchild Semiconductor", Max Forward Surge Current (Ifsm)=1A, Max Operating Temperature=175°C, Max Power Dissipation=500mW, Max Repetitive Reverse Voltage (Vrrm)=100V, Max Surge Current=4A, Min Operating Temperature=-65°C, Package Quantity=2000, Peak Reverse Current=5uA, Supplier Part Number 1=1N4148-DIE-ND, ComponentLink1Description=https://datasheet.ciiva.com/910/1n914-910546.pdf, ComponentLink1URL=https://datasheet.ciiva.com/910/1n914-910546.pdf, ComponentLink2Description=https://datasheet.ciiva.com/1242/1716967-1242233.pdf, ComponentLink2URL=https://datasheet.ciiva.com/1242/1716967-1242233.pdf, ComponentLink3Description=https://datasheet.ciiva.com/3304/fdll914b-3304217.pdf, ComponentLink3URL=https://datasheet.ciiva.com/3304/fdll914b-3304217.pdf, ComponentLink4Description=https://datasheet.ciiva.com/25951/fdll914b-25951516.pdf, ComponentLink4URL=https://datasheet.ciiva.com/25951/fdll914b-25951516.pdf, ComponentLink5Description=https://datasheet.ciiva.com/27049/743285-27049708.pdf, ComponentLink5URL=https://datasheet.ciiva.com/27049/743285-27049708.pdf, ComponentLink6Description=https://datasheet.ciiva.com/16740/1n4148-16740829.pdf, ComponentLink6URL=https://datasheet.ciiva.com/16740/1n4148-16740829.pdf, Contact Plating=Tin, Current Rating=200mA, Diameter=1.91mm, Element Configuration=Single, Forward Current=200mA, Height=4.56mm, Lead Free="Lead Free", Length=4.56mm, Manufacturer Part Number=1N4148, Mount="Through Hole", Number of Pins=2, Output Current=200mA, Outside Diameter=1.85mm, Packaging=Bulk, Peak Non-Repetitive Surge Current=4A, Polarity=Standard, Power Dissipation=500mW, Pricing 1="25=4 (USD)", Radiation Hardening=No, REACH SVHC="No SVHC", Recovery Time=4ns, Reverse Recovery Time=4ns, Reverse Voltage (DC)=100V, Stock 1=0, Supplier 1=Digi-Key, Voltage Rating (DC)=100V, Weight=0.01lb, Width=1.91mm
F1 F2 F3: Current Rating=30A, Manufacturer=Littelfuse, Manufacturer Part Number=01220093Z, Package Quantity=1000, Supplier Part Number 1=F4185-ND, Voltage=250V, Body Material=Copper, ComponentLink1Description=https://datasheet.ciiva.com/295/littelfuse-fuse-clips-295529.pdf, ComponentLink1URL=https://datasheet.ciiva.com/295/littelfuse-fuse-clips-295529.pdf, Depth=9.4mm, Height=10.67mm, Lead Free="Lead Free", Length=7.11mm, Material=Copper,Tin, Mount=Horizontal,PCB, Number of Circuits=1, Packaging=Bulk, Pricing 1="1=0.72, 5=0.696, 10=0.674, 50=0.5672, 100=0.4708, 250=0.428, 500=0.3638, 1000=0.321, 5000=0.2889 (USD)", Stock 1=10489, Supplier 1=Digi-Key, Termination="PC Pin", Voltage Rating=250V, Width=7.87mm
P1 P2 P3 P4 P5 P15 P16 P17: library part "Terminal Block 2", "2 way terminal block", Colour=Green, Current=20A, Current Rating=24A, Manufacturer="Phoenix Contact", Package Quantity=100, Supplier Part Number 1=277-6267-ND, Voltage=300V, Voltage Rating=400V, Approvals=UL, ComponentLink1Description=https://datasheet.ciiva.com/6752/1991095-6752880.pdf, ComponentLink1URL=https://datasheet.ciiva.com/6752/1991095-6752880.pdf, ComponentLink2Description=https://datasheet.ciiva.com/16051/1991095-16051374.pdf, ComponentLink2URL=https://datasheet.ciiva.com/16051/1991095-16051374.pdf, ComponentLink3Description=https://datasheet.ciiva.com/29222/774864-da-01-en-printklemme-1991095-100-st-29222380.pdf, ComponentLink3URL=https://datasheet.ciiva.com/29222/774864-da-01-en-printklemme-1991095-100-st-29222380.pdf, Depth=13.5mm, Housing Colour=Green, Housing Material=Nylon, Lead Free="Lead Free", Length=11.4mm, Manufacturer Part Number=1991095, Max Current Rating=24A, Mount="Through Hole", Number of Circuits=2, Number of Contacts=2, Number of Levels=1, Number of Poles=2, Number of Positions=2, Number of Positions Per Level=2, Number of Rows=1, Orientation=Straight, Packaging=Bulk, Pitch=5mm, Pricing 1="1=1.13, 10=1.078, 50=1.0486, 100=0.98, 250=0.9016, 500=0.833, 1000=0.7938, 2500=0.7448 (USD)", Stock 1=1914, Supplier 1=Digi-Key, Termination=Screwless, Weight=0.102294oz, Width=14.4mm, Wire Gauge (Max)=24AWG, Wire Gauge (Min)=12AWG
P18: "Header, 8-Pin, Dual row", Case/Package=100, Colour=Black, Manufacturer="On-Shore Technology", Manufacturer Part Number=302-S161, ComponentLink1Description=https://datasheet.ciiva.com/742/302-sxxx-742189.pdf, ComponentLink1URL=https://datasheet.ciiva.com/742/302-sxxx-742189.pdf, Connector Type="Male Pin", Contact Plating=Gold, LatestRevisionDate=17-Jul-2002, LatestRevisionNote="Re-released for DXP Platform.", Mount="Through Hole", Number of Positions=16, Number of Rows=2, Packaging=Tray, Pitch=0.1inch, Pricing 1="1=0.4, 10=0.375, 100=0.2622, 500=0.2247, 1000=0.1873, 5000=0.1605, 10000=0.1498 (USD)", Publisher="Altium Limited", Row Spacing=0.1inch, Stock 1=8758, Supplier 1=Digi-Key, Termination=Solder
Q1_A Q1_B Q1_C Q2_A Q2_B Q2_C Q3_A Q3_B Q3_C Q4_A Q4_B Q4_C: "MOSFET 34A", Case/Package=TO-264-3, Continuous Drain Current (ID)=34A, Drain to Source Breakdown Voltage=800V, Drain to Source Resistance=240mR, Gate to Source Voltage (Vgs)=20V, Input Capacitance=7.5nF, Manufacturer=IXYS, Manufacturer Part Number=IXFK34N80, Max Operating Temperature=150°C, Max Power Dissipation=560W, Min Operating Temperature=-55°C, Package Quantity=25, Supplier Part Number 1=IXFK34N80-ND, ComponentLink1Description=https://datasheet.ciiva.com/4446/98560-63299-4446514.pdf, ComponentLink1URL=https://datasheet.ciiva.com/4446/98560-63299-4446514.pdf, ComponentLink2Description=https://datasheet.ciiva.com/16298/98560-16298076.pdf, ComponentLink2URL=https://datasheet.ciiva.com/16298/98560-16298076.pdf, ComponentLink3Description=https://datasheet.ciiva.com/940/98560-940430.pdf, ComponentLink3URL=https://datasheet.ciiva.com/940/98560-940430.pdf, ComponentLink4Description=https://datasheet.ciiva.com/14110/tb612985-e-14110030.pdf, ComponentLink4URL=https://datasheet.ciiva.com/14110/tb612985-e-14110030.pdf, ComponentLink5Description=https://datasheet.ciiva.com/26791/ixfk34n80-26791415.pdf, ComponentLink5URL=https://datasheet.ciiva.com/26791/ixfk34n80-26791415.pdf, Current Rating=34A, Drain to Source Voltage (Vdss)=800V, Element Configuration=Single, Fall Time=40ns, Lead Free="Lead Free", Packaging=Rail/Tube, Power Dissipation=560W, Pricing 1="1=22.64, 10=20.94, 25=19.2424, 100=17.884, 250=16.4126 (USD)", Rds On Max=240mR, Recovery Time=250ns, Rise Time=45ns, Stock 1=25, Supplier 1=Digikey, Turn-Off Delay Time=100ns, Voltage Rating (DC)=800V
R1 R2 R3 R4 R5 R6 R7 R8 R9 R10 R11 R12 R13_A R13_B R13_C R17_A R17_B R17_C R18_A R18_B R18_C R19_A R19_B R19_C: library part RES_SMD1, "RES SMD 1% 1/4W 1206", Manufacturer="Panasonic Electronic Components", Manufacturer Part Number=ERJ-8ENF9101V, Operating Temperature="-55°C ~ 155°C", Package / Case="1206 (3216 Metric)", Power (Watts)="0.25W, 1/4W", Supplier Device Package=1206, Supplier Part Number 1=P9.10KFDKR-ND, Temperature Coefficient=±100ppm/°C, Tolerance=±1%, Category=Resistors, ComponentLink1Description=http://industrial.panasonic.com/www-cgi/jvcr13pz.cgi?E+PZ+3+AOA0002+ERJ8ENF9101V+7+WW, ComponentLink1URL=http://industrial.panasonic.com/www-cgi/jvcr13pz.cgi?E+PZ+3+AOA0002+ERJ8ENF9101V+7+WW, Composition="Thick Film", Failure Rate=-, Features="Automotive AEC-Q200", Height="0.028\" (0.70mm)", Number of Terminations=2, Packaging=Digi-Reel®, Part Status=Active, Pricing 1="1=0.15, 50=0.0424, 100=0.0313, 250=0.02384, 500=0.01908, 1000=0.01404 (CAD)", RoHS="RoHS Compliant", Size / Dimension="0.126\" L x 0.063\" W (3.20mm x 1.60mm)", Stock 1=17632, Supplier 1=Digi-Key
R14_A R14_B R14_C R15_A R15_B R15_C R16_A R16_B R16_C R20_A R20_B R20_C: "Variable Resistor", Colour=Blue, Manufacturer="Nidec Copal", Manufacturer Part Number=CT-6EP103, Max Operating Temperature=120°C, Max Power Dissipation=500mW, Min Operating Temperature=-55°C, Resistance=10KR, Supplier Part Number 1=CT6EP103-ND, Temperature Coefficient=100ppm/°C, Tolerance=10%, ComponentLink1Description=https://datasheet.ciiva.com/2156/ct-6-2156122.pdf, ComponentLink1URL=https://datasheet.ciiva.com/2156/ct-6-2156122.pdf, Composition=Potentiometer, Contact Plating=Tin, LatestRevisionDate=17-Jul-2002, LatestRevisionNote="Re-released for DXP Platform.", Lead Free="Lead Free", Length=0.228inch, Mount="Through Hole", Number of Turns=1, PackageDescription="Axial Device, Thru-Hole; 2 Leads; 0.6 in Pin Spacing", PackageReference=AXIAL-0.6, Packaging=Bulk, Pricing 1="1=0.79, 10=0.711, 25=0.6428, 50=0.6196, 100=0.5852, 250=0.5623, 500=0.5279, 1000=0.4361, 5000=0.3557 (USD)", Published=8-Jun-2000, Publisher="Altium Limited", Set Position=0.5, Stock 1=31633, Supplier 1=Digikey, Termination="PC Pins", Weight=510mg
S1: Case/Package=DIP, Current Rating=50mA, Manufacturer="CTS Electrocomponents", Manufacturer Part Number=206-12ST, Max Operating Temperature=85°C, Min Operating Temperature=-55°C, Package Quantity=15, Supplier Part Number 1=CT20612ST-ND, Voltage Rating (DC)=24V, Body Material=Plastic, ComponentLink1Description=https://datasheet.ciiva.com/26926/getdatasheetpartid-771341-26926550.pdf, ComponentLink1URL=https://datasheet.ciiva.com/26926/getdatasheetpartid-771341-26926550.pdf, ComponentLink2Description=https://datasheet.ciiva.com/2864/206-208-2864231.pdf, ComponentLink2URL=https://datasheet.ciiva.com/2864/206-208-2864231.pdf, ComponentLink3Description=https://datasheet.ciiva.com/15184/getdatasheetpartid-112074-15184826.pdf, ComponentLink3URL=https://datasheet.ciiva.com/15184/getdatasheetpartid-112074-15184826.pdf, ComponentLink4Description=https://datasheet.ciiva.com/17068/206-208-17068348.pdf, ComponentLink4URL=https://datasheet.ciiva.com/17068/206-208-17068348.pdf, Contact Material=Copper, Contact Plating=Tin,Gold, Depth=9.78mm, Electrical Life=10000Cycles, Lead Free="Lead Free", Length=1.286inch, Max Current Rating=50mA, Mount="Through Hole", Number of Positions=12, Orientation=Straight, Packaging=Rail/Tube, Pitch=0.1inch, Pricing 1="1=1.41, 10=1.33, 25=1.2752, 50=1.194, 100=1.1668, 250=1.0312, 500=0.9769, 1000=0.8684, 5000=0.7598 (USD)", Radiation Hardening=No, Stock 1=2620, Supplier 1=Digi-Key, Terminal Pitch=2.54mm, Termination="PC Pin", Throw Configuration=SPST, Washable=Yes
T6 T7: library part HFBR-1524Z, "Otical Transmitter", Capacitance=86pF, Case/Package=600, Forward Current=80mA, Forward Voltage=1.67V, Manufacturer="Broadcom Avago", Max Operating Temperature=85°C, Max Output Current=5.1mA, Min Operating Temperature=-40°C, Package Quantity=200, Reverse Voltage (DC)=5V, Supplier Part Number 1=516-2046-ND, ComponentLink1Description=https://datasheet.ciiva.com/27056/2062150-27056536.pdf, ComponentLink1URL=https://datasheet.ciiva.com/27056/2062150-27056536.pdf, ComponentLink2Description=https://datasheet.ciiva.com/18408/70158101-18408620.pdf, ComponentLink2URL=https://datasheet.ciiva.com/18408/70158101-18408620.pdf, ComponentLink3Description=https://datasheet.ciiva.com/26913/hfbr-1524z-26913686.pdf, ComponentLink3URL=https://datasheet.ciiva.com/26913/hfbr-1524z-26913686.pdf, Data Rate=1Mbps, Fall Time=40ns, Height=7.62mm, Lead Free="Lead Free", Length=18.8mm, Manufacturer Part Number=HFBR-1524Z, Mount="Through Hole", Number of Pins=6, Packaging=Rail/Tube, Pricing 1="1=11.66, 10=10.56, 25=8.36, 100=7.04, 250=6.6, 500=6.05, 1000=5.72 (USD)", Radiation Hardening=No, REACH SVHC="No SVHC", Rise Time=80ns, Stock 1=1574, Supplier 1=Digikey, Supply Voltage=5V, Wavelength=660nm, Width=10.2mm
T8 T9 T10 T11 T12 T13: library part HFBR-2524Z, "Optical Reciever"
U4: "48 +/-12V Converter", Case/Package=DIP, Current - Output 1=125mA, Isolation Voltage=1.5kV, Manufacturer="Traco Power", Manufacturer Part Number=TDR3-4822, Max Input Voltage=75V, Max Operating Temperature=85°C, Max Output Power=3W, Min Input Voltage=36V, Min Operating Temperature=-40°C, Nominal Input Voltage=48V, Nominal Output Voltage=-12V, Output Voltage=12V, Supplier Part Number 1=20X0418, ComponentLink1Description=http://components.arrow.com/part/dataview/0323_02838307, ComponentLink1URL=http://components.arrow.com/part/dataview/0323_02838307, ComponentLink2Description=http://www.farnell.com/datasheets/1763516.pdf, ComponentLink2URL=http://www.farnell.com/datasheets/1763516.pdf, ComponentLink3Description=http://uk.rs-online.com/webdocs/0e35/0900766b80e35ed7.pdf, ComponentLink3URL=http://uk.rs-online.com/webdocs/0e35/0900766b80e35ed7.pdf, ComponentLink4Description=http://docs-usa.electrocomponents.com/techlib:/itc_doclist_US.htm?stockno=7065629, ComponentLink4URL=http://docs-usa.electrocomponents.com/techlib:/itc_doclist_US.htm?stockno=7065629, Current - Output 2=125mA, Depth=18.9mm, Efficiency=82%, Height=8.7mm, Isolation=Isolated, Length=18.9mm, Max Input Voltage (DC)=75V, Max Output Current=125mA, Min Input Voltage (DC)=36V, Number of Outputs=2, Number of Pins=7, Output Current=125mA, Packaging=Rail/Tube, Pricing 1="1=31.75, 25=29.09, 50=27.03, 100=26.14, 250=25.25 (USD)", REACH SVHC="No SVHC", Stock 1=10, Supplier 1=Newark, Voltage - Output 1=12V, Voltage - Output 2=-12V, Width=12.8mm
U5: "48V-5V Converter", Case/Package=DIP, Current - Output 1=600mA, Isolation Voltage=1.5kV, Manufacturer="Traco Power", Manufacturer Part Number=TDR3-4811, Max Input Voltage=75V, Max Operating Temperature=85°C, Max Output Power=3W, Min Input Voltage=36V, Min Operating Temperature=-40°C, Nominal Input Voltage=48V, Nominal Output Voltage=5V, Supplier Part Number 1=495-TDR3-4811, ComponentLink1Description=https://datasheet.ciiva.com/28438/1763516-28438522.pdf, ComponentLink1URL=https://datasheet.ciiva.com/28438/1763516-28438522.pdf, Depth=18.9mm, Efficiency=81%, Height=8.7mm, Isolation=Isolated, Length=18.9mm, Max Input Voltage (DC)=75V, Max Output Current=600mA, Min Input Voltage (DC)=36V, Number of Outputs=1, Number of Pins=7, Output Current=600mA, Output Voltage=5V, Packaging=Rail/Tube, Pricing 1="1=31.28, 10=29.54, 50=25.71, 100=25.71, 1000=25.71, 10000=25.71 (USD)", REACH SVHC="No SVHC", Stock 1=10, Supplier 1=Mouser, Voltage - Output 1=5V, Width=12.8mm
U6 U8: "VCO", Case/Package=DIP, Frequency=2.4MHz, Manufacturer="Texas Instruments", Manufacturer Part Number=CD4046BE, Max Operating Temperature=125°C, Max Supply Voltage=18V, Min Operating Temperature=-55°C, Min Supply Voltage=3V, Nominal Supply Current=10mA, Package Quantity=25, Supplier Part Number 1=296-2052-5-ND, ComponentLink1Description=https://datasheet.ciiva.com/14134/cd4046b-eng-tds-14134658.pdf, ComponentLink1URL=https://datasheet.ciiva.com/14134/cd4046b-eng-tds-14134658.pdf, ComponentLink2Description=https://datasheet.ciiva.com/15153/getdatasheetpartid-241639-15153402.pdf, ComponentLink2URL=https://datasheet.ciiva.com/15153/getdatasheetpartid-241639-15153402.pdf, ComponentLink3Description=https://datasheet.ciiva.com/14247/cd4046b-14247052.pdf, ComponentLink3URL=https://datasheet.ciiva.com/14247/cd4046b-14247052.pdf, ComponentLink4Description=https://datasheet.ciiva.com/26229/cd4046b-mil-26229407.pdf, ComponentLink4URL=https://datasheet.ciiva.com/26229/cd4046b-mil-26229407.pdf, ComponentLink5Description=https://datasheet.ciiva.com/27050/817951-27050191.pdf, ComponentLink5URL=https://datasheet.ciiva.com/27050/817951-27050191.pdf, ComponentLink6Description=https://datasheet.ciiva.com/29297/172880-da-01-en-c-mos-ic-cd4046be-dip16-tid-29297245.pdf, ComponentLink6URL=https://datasheet.ciiva.com/29297/172880-da-01-en-c-mos-ic-cd4046be-dip16-tid-29297245.pdf, Contact Plating=Gold, Input=CMOS, Lead Free="Lead Free", Max Frequency=2.4MHz, Mount="Through Hole", Number of Bits=1, Number of Circuits=1, Number of Elements=1, Number of Pins=16, Packaging=Rail/Tube, PLL=Yes, Pricing 1="1=0.56, 10=0.476, 100=0.3556, 500=0.2794, 1000=0.2159 (USD)", Radiation Hardening=No, REACH SVHC="No SVHC", Stock 1=1216, Supplier 1=Digikey, Weight=0.03357oz
U7: "Dual Peripheral Drivers", Case/Package=PDIP, Manufacturer="Texas Instruments", Manufacturer Part Number=SN75451BP, Max Input Voltage=5.5V, Max Operating Temperature=70°C, Max Power Dissipation=1W, Max Supply Current=65mA, Max Supply Voltage=5.25V, Min Operating Temperature=0°C, Min Supply Voltage=4.75V, Output Current=400mA, Output Voltage=30V, Package Quantity=50, Supplier Part Number 1=296-1746-5-ND, ComponentLink1Description=https://datasheet.ciiva.com/1501/1387986-1501952.pdf, ComponentLink1URL=https://datasheet.ciiva.com/1501/1387986-1501952.pdf, ComponentLink2Description=https://datasheet.ciiva.com/1609/slrs021b-1609184.pdf, ComponentLink2URL=https://datasheet.ciiva.com/1609/slrs021b-1609184.pdf, ComponentLink3Description=https://datasheet.ciiva.com/15115/getdatasheetpartid-134903-15115475.pdf, ComponentLink3URL=https://datasheet.ciiva.com/15115/getdatasheetpartid-134903-15115475.pdf, ComponentLink4Description=https://datasheet.ciiva.com/14180/nr645830-645832-e-14180149.pdf, ComponentLink4URL=https://datasheet.ciiva.com/14180/nr645830-645832-e-14180149.pdf, ComponentLink5Description=https://datasheet.ciiva.com/3303/sn75453b-3303271.pdf, ComponentLink5URL=https://datasheet.ciiva.com/3303/sn75453b-3303271.pdf, ComponentLink6Description=https://datasheet.ciiva.com/16470/sn75453b-16470791.pdf, ComponentLink6URL=https://datasheet.ciiva.com/16470/sn75453b-16470791.pdf, ComponentLink7Description=https://datasheet.ciiva.com/26229/sn75453b-26229559.pdf, ComponentLink7URL=https://datasheet.ciiva.com/26229/sn75453b-26229559.pdf, ComponentLink8Description=https://datasheet.ciiva.com/19477/1054748-19477417.pdf, ComponentLink8URL=https://datasheet.ciiva.com/19477/1054748-19477417.pdf, ComponentLink9Description=https://datasheet.ciiva.com/1949/sn75452b-1949982.pdf, ComponentLink9URL=https://datasheet.ciiva.com/1949/sn75452b-1949982.pdf, ComponentLink10Description=https://datasheet.ciiva.com/1501/1829915-1501951.pdf, ComponentLink10URL=https://datasheet.ciiva.com/1501/1829915-1501951.pdf, ComponentLink11Description=https://datasheet.ciiva.com/41462/001014510-da-01-en-ic-dual-peripheral-sn75451bp-pdip-8-tid-41462363.pdf, ComponentLink11URL=https://datasheet.ciiva.com/41462/001014510-da-01-en-ic-dual-peripheral-sn75451bp-pdip-8-tid-41462363.pdf, Height=4.57mm, Lead Free="Lead Free", Length=9.81mm, Nominal Supply Current=65mA, Number of Drivers=2, Number of Outputs=2, Number of Pins=8, Packaging=Rail/Tube, Power Dissipation=1W, Pricing 1="1=0.89, 10=0.794, 100=0.6187, 500=0.5111, 1000=0.4035 (USD)", Propagation Delay=25ns, Radiation Hardening=No, REACH SVHC="No SVHC", Stock 1=2217, Supplier 1=Digi-Key, Turn-Off Delay Time=12ns, Turn-On Delay Time=8ns, Weight=0.015535oz, Width=6.35mm